# EAGLE board basicbridge5v1A (EAGLE 9.6.2)
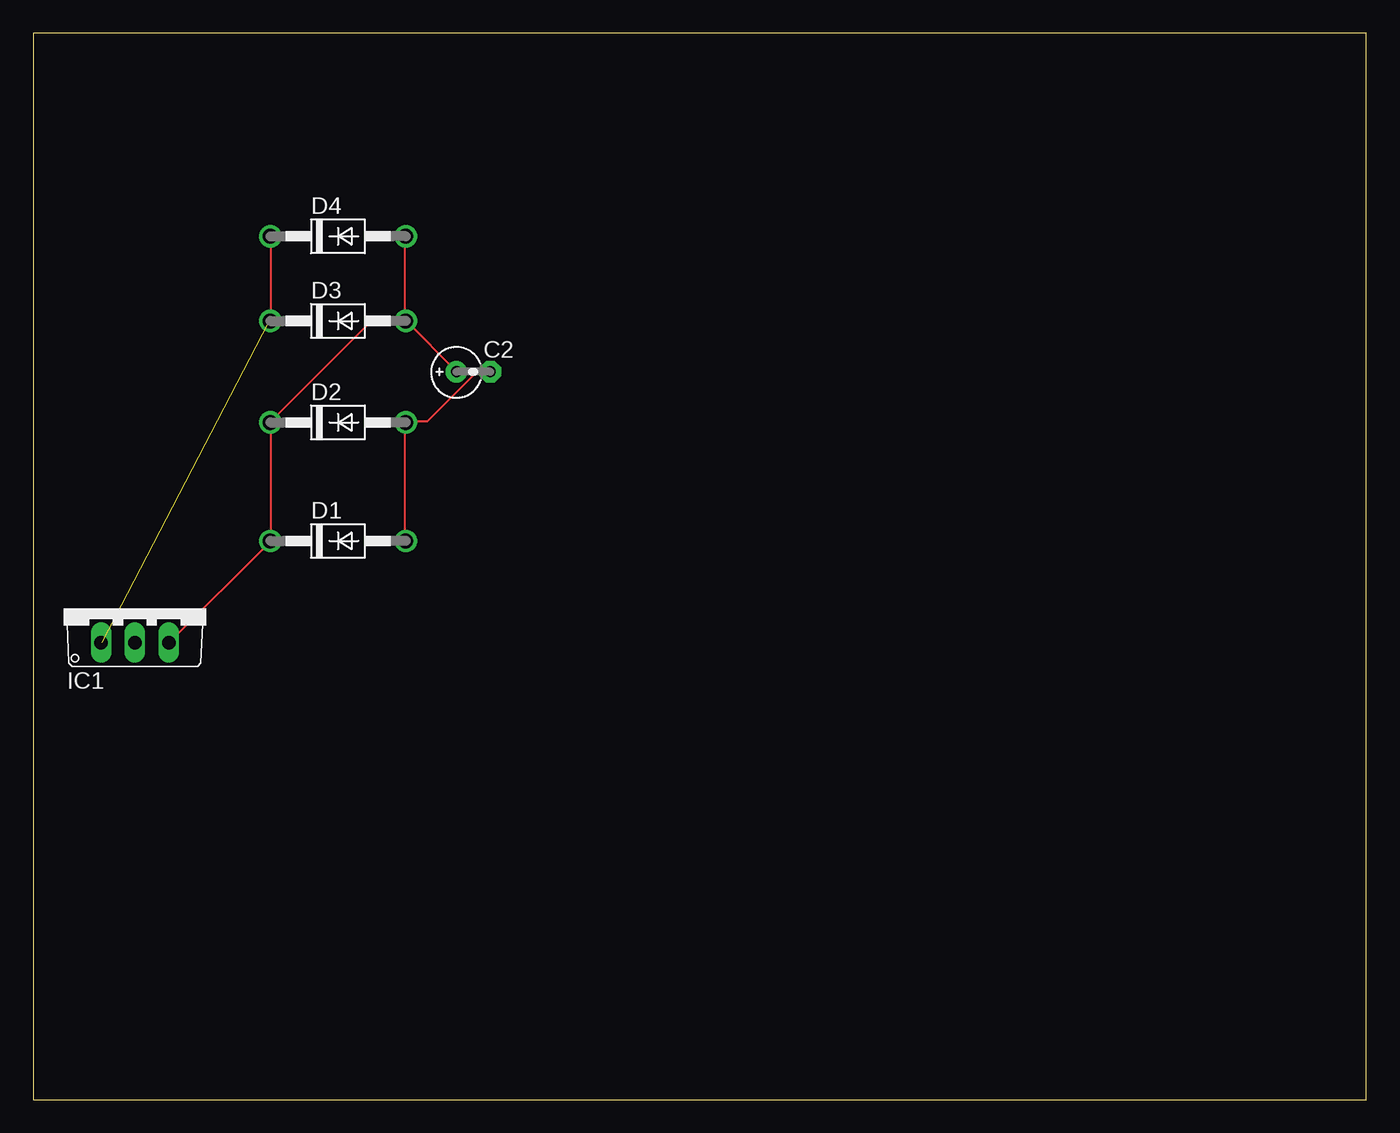
[diagram p0: board, top side]
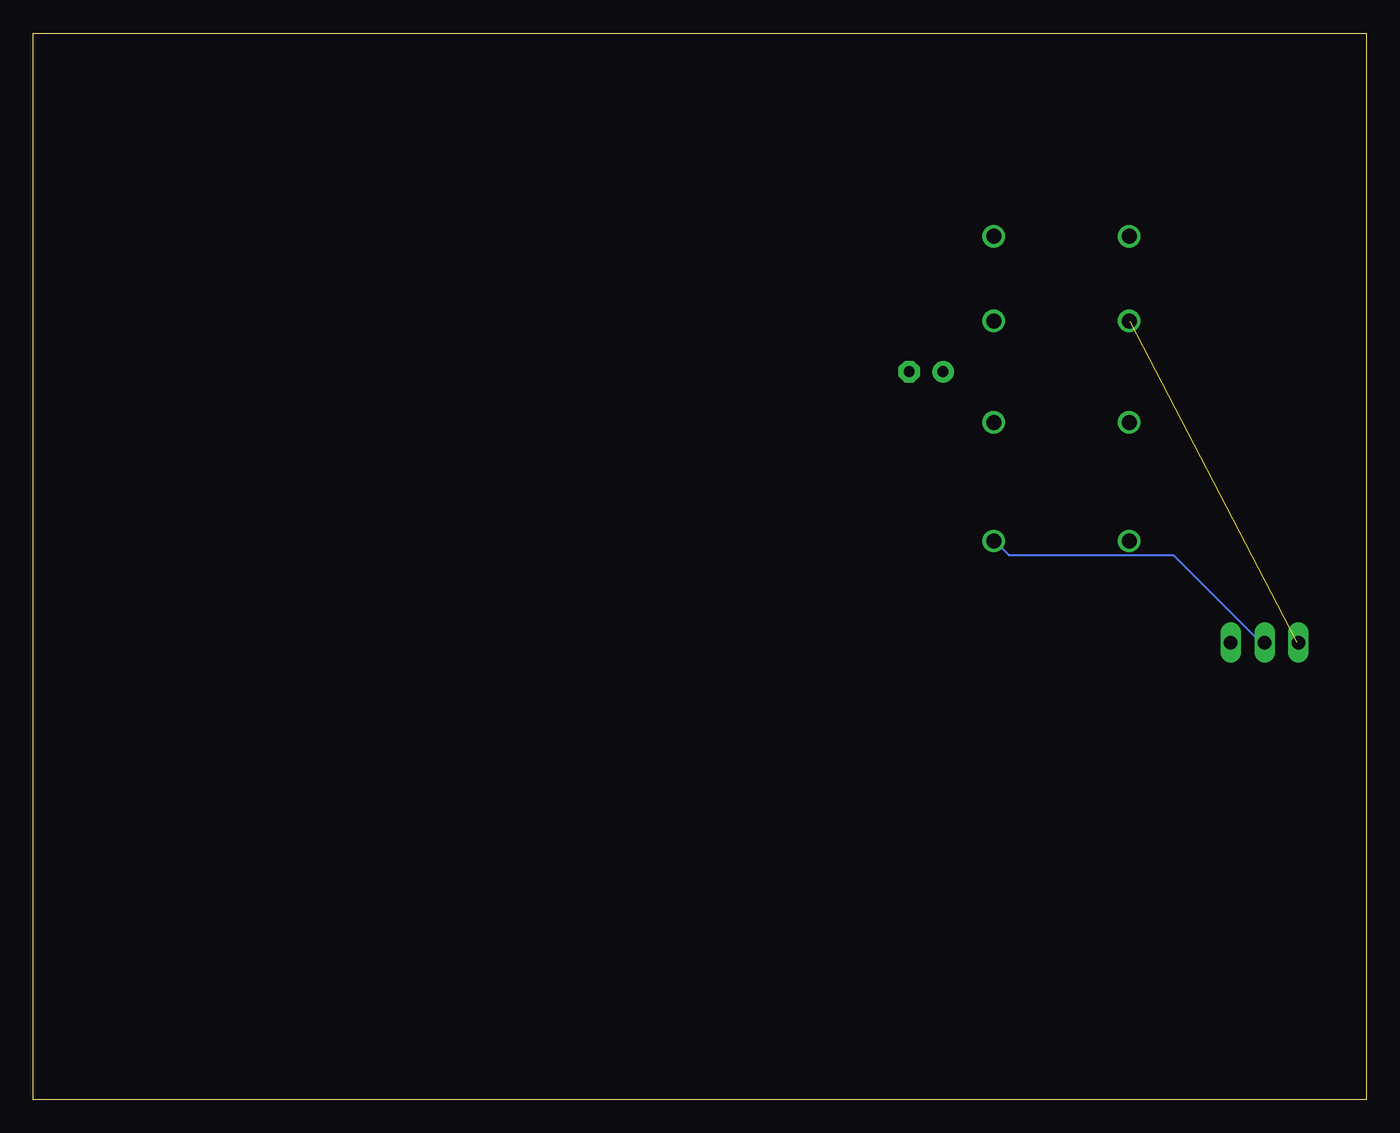
[diagram p1: board, bottom side, seen from below]

Size 100 x 80 mm. Coordinates in mm from the lower left corner, seen from the top.
Outline: 0,0 100,0 100,80 0,80 0,0
Copper layers (1*16): Top 0.035mm / dielectric 1.5mm / Bottom 0.035mm
Design rules "default": minimum track width 6mil, minimum drill 0.35mm, track to track 6mil, track to pad 6mil, pad to pad 6mil, via to via 6mil, smd to smd 6mil, copper to edge 40mil, drill to drill 6mil, minimum pad ring 10mil, minimum via ring 8mil, stop-mask expansion 4mil, vias tented up to drill 0mil, thermal gap 10mil

## Footprints (pad centres in the part's own frame; a part is rotated, then mirrored left to right if it is on the bottom)
E2,5-4R = drill 0.813 pad 1.6: + -1.27,0 | drill 0.813 pad 1.6 octagon: - 1.27,0
DO41-10 = drill 1.118: A 5.08,0; C -5.08,0
TO220V = drill 1.016 long: 1 -2.54,-2.54; 2 0,-2.54; 3 2.54,-2.54

## Placement (x,y rotation side)
C2  [E2,5-4R]  33.02,54.61 0 top
D1  1N4004  [DO41-10]  22.86,41.91 0 top
D2  1N4004  [DO41-10]  22.86,50.8 0 top
D3  1N4004  [DO41-10]  22.86,58.42 0 top
D4  1N4004  [DO41-10]  22.86,64.77 0 top
IC1  7805TV  [TO220V]  7.62,36.83 0 top

## Library data of the parts
C2 = rcl; SPICEPREFIX: C
D1-D4 = diode
IC1 = linear

## Nets
GND: C2.- D1.A D2.A IC1.2
N$7: D3.C D4.C IC1.1
VCC: C2.+ D1.C D2.C D3.A D4.A IC1.3

## Tracks (layer width: path | path; a pad name or v marks a point on that pad's centre or on a via)
GND
  Top 0.152: C2.- 34.29,54.56 33.22,54.56 29.57,50.9 28.04,50.9 D2.A 27.89,50.75 27.89,41.91 D1.A
  Bottom 0.152: IC1.2 7.92,34.29 14.48,40.84 26.82,40.84 27.89,41.91 D1.A
N$7  (1 unrouted)
  Top 0.152: 5.18,34.29 IC1.1 | 17.68,58.37 D3.C 17.83,58.52 17.83,64.77 D4.C
VCC
  Top 0.152: C2.+ 31.7,54.71 28.04,58.37 D3.A | D4.A 27.89,64.77 27.89,58.52 D3.A | 17.83,41.91 10.21,34.29 IC1.3 | 17.83,41.91 17.83,50.75 D2.C 17.83,50.9 25.3,58.37 27.89,58.37 D3.A | 17.83,41.91 D1.C